# Altium PCB cardio_pcb.PcbDoc
Units mil, origin at the board's own origin, x right, y up, seen from the top; angles counter-clockwise.
Board outline 6890 x 3346 mil, 2 copper layers (Top Layer, Bottom Layer); 111 components, 104 nets, 414 pads, 42 vias.
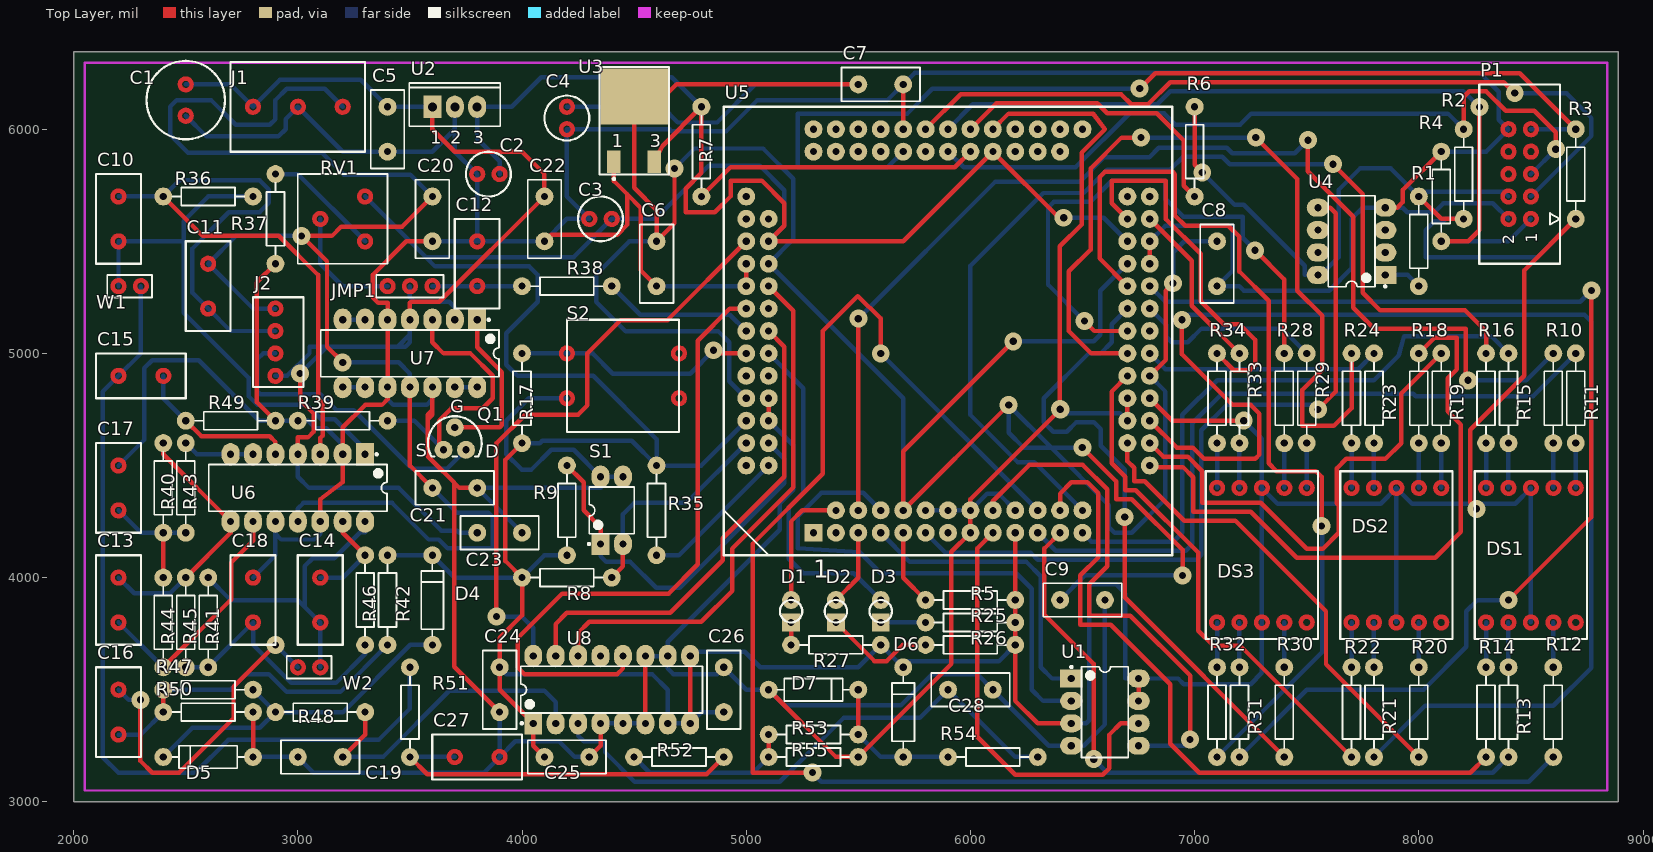
[diagram p0: Top Layer view]
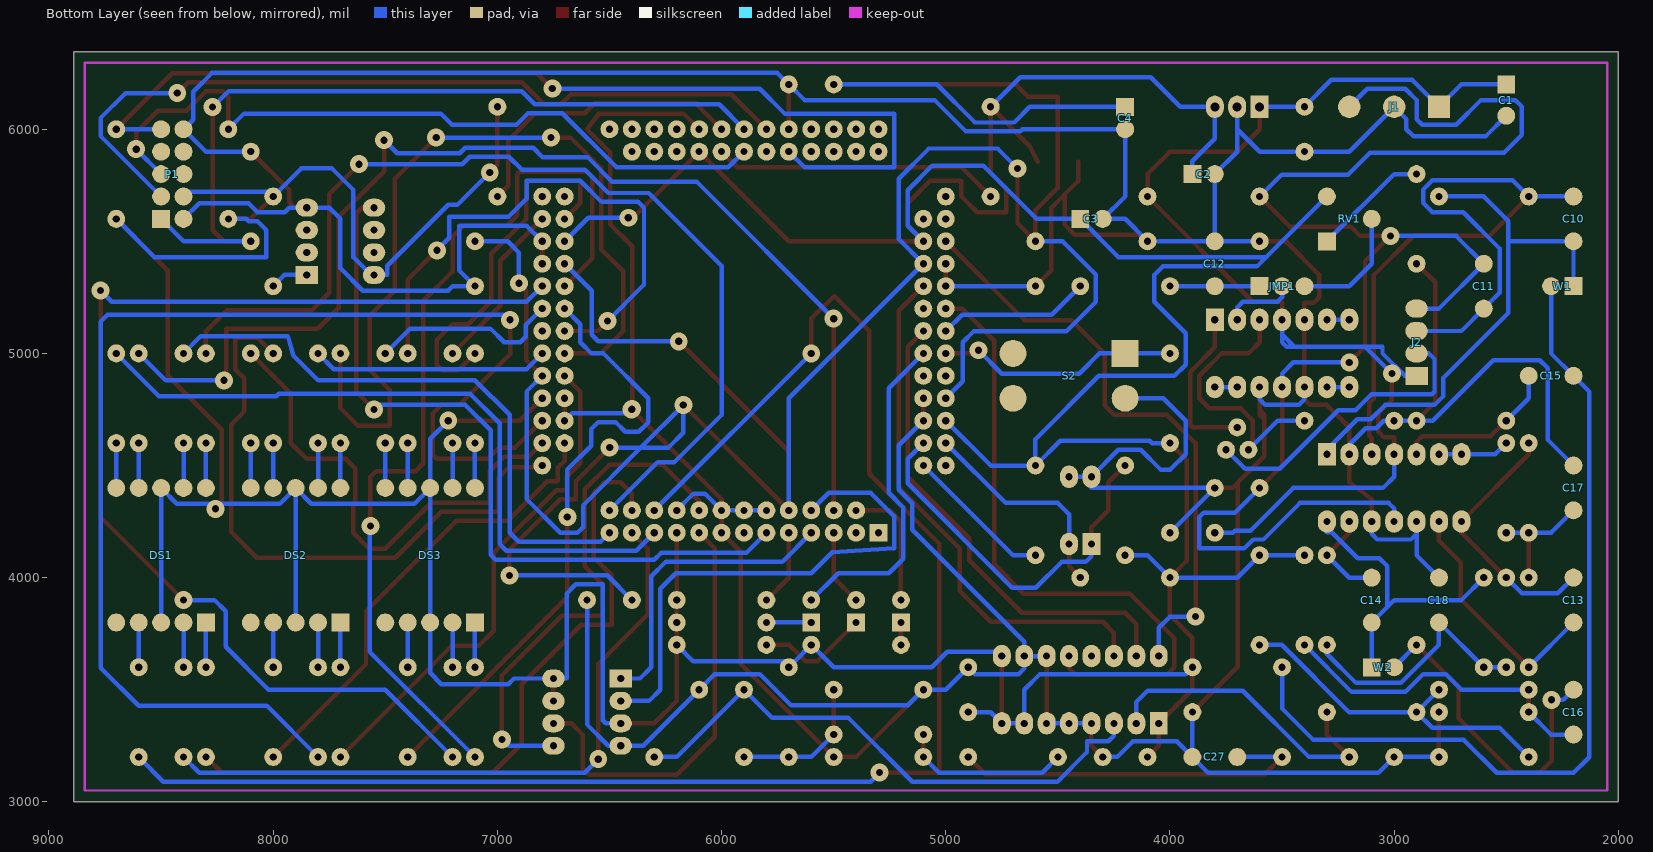
[diagram p1: Bottom Layer view, seen from below]

## Layer stack, top to bottom
Top Solder: solder mask 0.4, Solder Resist, Dk 3.5
Top Layer: signal copper 1.4
Dielectric 1: dielectric 12.6, FR-4, Dk 4.8
Bottom Layer: signal copper 1.4
Bottom Solder: solder mask 0.4, Solder Resist, Dk 3.5

## Board outline
2000,3000 8890,3000 8890,6346 2000,6346

## Design rules (kind name [scope] priority, off if disabled: settings)
Clearance [All] p1: gap=20
PolygonConnect [All] p1: connectstyle=Relief reliefconductorwidth=10 reliefentries=4 polygonreliefangle="90 Angle" airgapwidth=10
RoutingVias [All] p1: holewidth=32 width=80 viastyle="Through Hole" minholewidth=28 minwidth=50 maxholewidth=28 maxwidth=50
SolderMaskExpansion [All] p1: expansion=4
Width [All] p1: maxlimit=20 minlimit=20 preferedwidth=20
30 further rules are at their usual default settings.

## Classes and differential pairs
component class CONTROL: C1 C2 C3 C4 C5 C6 C7 C8 C9 D1 D2 D3 DS1 DS2 DS3 J1 P1 R1 R2 R3 R4 R5 R6 R7 R8 R9 R10 R11 R12 R13 R14 R15 R16 R17 R18 R19 R20 R21 R22 R23 R24 R25 R26 R27 R28 R29 R30 R31 R32 R33 R34 R35 S1 S2 U1 U2 U3 U4 U5
component class INTER: C10 C11 C12 C13 C14 C15 C16 C17 C18 C19 C20 C21 C22 C23 C24 C25 C26 C27 C28 D4 D5 D6 D7 J2 JMP1 Q1 R36 R37 R38 R39 R40 R41 R42 R43 R44 R45 R46 R47 R48 R49 R50 R51 R52 R53 R54 R55 RV1 U6 U7 U8 W1 W2
net class AFFC[0..6]: AFFC0 AFFC1 AFFC2 AFFC3 AFFC4 AFFC5 AFFC6
net class AFFD[0..6]: AFFD0 AFFD1 AFFD2 AFFD3 AFFD4 AFFD5 AFFD6
net class AFFU[0..6]: AFFU0 AFFU1 AFFU2 AFFU3 AFFU4 AFFU5 AFFU6

## Components (designator, comment, footprint, x,y, rotation, side; value= is the part's Value field where it differs from the comment)
C1 "100uF" RB0.14/0.35 2500,6200 r270 top
C2 "2.2uF" RB0.1/0.2 3900,5800 r180 top
C3 "10uF" RB0.1/0.2 4400,5600 r180 top
C4 "10uF" RB0.1/0.2 4200,6100 r270 top
C5 "0.1uF" RAD-0.2 3400,6000 r90 top
C6 "100nF" RAD-0.2 4600,5400 r90 top
C7 "100nF" RAD-0.2 5600,6200 r180 top
C8 "100nF" RAD-0.2 7100,5400 r90 top
C9 "100nF" RAD-0.2 6500,3900 r180 top
C10 "4.7nF" RAD-0.2-BOT 2200,5500 r90 top
C11 "470pF" RAD-0.2-BOT 2600,5200 r90 top
C12 "470nF" RAD-0.2-BOT 3800,5500 r270 top
C13 "15nF" RAD-0.2-BOT 2200,4000 r270 top
C14 "4.7nF" RAD-0.2-BOT 3100,3800 r90 top
C15 "470nF" RAD-0.2-BOT 2400,4900 r180 top
C16 "470nF" RAD-0.2-BOT 2200,3500 r270 top
C17 "220nF" RAD-0.2-BOT 2200,4300 r90 top
C18 "470nF" RAD-0.2-BOT 2800,3800 r90 top
C19 "100nF" RAD-0.2 3100,3200 r0 top
C20 "100nF" RAD-0.2 3600,5600 r90 top
C21 "100nF" RAD-0.2 3700,4400 r180 top
C22 "100nF" RAD-0.2 4100,5600 r90 top
C23 "100nF" RAD-0.2 3900,4200 r180 top
C24 "100nF" RAD-0.2 3900,3500 r90 top
C25 "100nF" RAD-0.2 4200,3200 r180 top
C26 "100nF" RAD-0.2 4900,3500 r270 top
C27 "470nF" RAD-0.2-BOT 3700,3200 r0 top
C28 "100nF" RAD-0.2 6000,3500 r180 top
D1 "LED0" LED-3MM 5200,3800 r90 top
D2 "LED0" LED-3MM 5400,3800 r90 top
D3 "LED0" LED-3MM 5600,3800 r90 top
D4 "1N4148" DIODE-0.4 3600,3900 r90 top
D5 "1N4148" DIODE-0.4 2600,3200 r180 top
D6 "1N4148" DIODE-0.4 5700,3400 r90 top
D7 "1N4148" DIODE-0.4 5300,3500 r0 top
DS1 "Dpy Blue-CA" AFF7SEG-14MM 8300,3800 r0 top
DS2 "Dpy Blue-CA" AFF7SEG-14MM 7700,3800 r0 top
DS3 "Dpy Blue-CA" AFF7SEG-14MM 7100,3800 r0 top
J1 "BORNIER 3 VIS" BORNIER-3 2800,6100 r0 top
J2 "CAPTEUR-CARDIO" KK-1X4M 2900,4900 r90 top
JMP1 "JUMPER-INV" JMP3-INV-0.1 3600,5300 r180 top
P1 "MHDR2X5" HE10-2X5M 8500,5600 r90 top
Q1 "2N7000" NMOS-TO92 3700,4600 r0 top
R1 "1K" AXIAL-0.4 8000,5500 r270 top
R2 "1K" AXIAL-0.4 8200,5800 r90 top
R3 "1K" AXIAL-0.4 8700,5800 r90 top
R4 "1K" AXIAL-0.4 8100,5700 r90 top
R5 "10K" AXIAL-0.4 6000,3900 r180 top
R6 "10K" AXIAL-0.4 7000,5900 r270 top
R7 "10K" AXIAL-0.4 4800,5900 r270 top
R8 "1K" AXIAL-0.4 4200,4000 r180 top
R9 "1K" AXIAL-0.4 4200,4300 r270 top
R10 "120" AXIAL-0.4 8600,4800 r270 top
R11 "120" AXIAL-0.4 8700,4800 r270 top
R12 "120" AXIAL-0.4 8600,3400 r90 top
R13 "120" AXIAL-0.4 8400,3400 r90 top
R14 "120" AXIAL-0.4 8300,3400 r90 top
R15 "120" AXIAL-0.4 8400,4800 r270 top
R16 "120" AXIAL-0.4 8300,4800 r270 top
R17 "1K" AXIAL-0.4 4000,4800 r270 top
R18 "120" AXIAL-0.4 8000,4800 r270 top
R19 "120" AXIAL-0.4 8100,4800 r270 top
R20 "120" AXIAL-0.4 8000,3400 r90 top
R21 "120" AXIAL-0.4 7800,3400 r90 top
R22 "120" AXIAL-0.4 7700,3400 r90 top
R23 "120" AXIAL-0.4 7800,4800 r270 top
R24 "120" AXIAL-0.4 7700,4800 r270 top
R25 "820" AXIAL-0.4 6000,3800 r0 top
R26 "820" AXIAL-0.4 6000,3700 r0 top
R27 "820" AXIAL-0.4 5400,3700 r0 top
R28 "120" AXIAL-0.4 7400,4800 r270 top
R29 "120" AXIAL-0.4 7500,4800 r270 top
R30 "120" AXIAL-0.4 7400,3400 r90 top
R31 "120" AXIAL-0.4 7200,3400 r90 top
R32 "120" AXIAL-0.4 7100,3400 r90 top
R33 "120" AXIAL-0.4 7200,4800 r270 top
R34 "120" AXIAL-0.4 7100,4800 r270 top
R35 "10K" AXIAL-0.4 4600,4300 r90 top
R36 "1M" AXIAL-0.4 2600,5700 r0 top
R37 "100" AXIAL-0.4 2900,5600 r90 top
R38 "3.3K" AXIAL-0.4 4200,5300 r180 top
R39 "82" AXIAL-0.4 3200,4700 r180 top
R40 "390K" AXIAL-0.4 2400,4400 r90 top
R41 "390K" AXIAL-0.4 2600,3800 r90 top
R42 "4.7M" AXIAL-0.4 3400,3900 r90 top
R43 "56K" AXIAL-0.4 2500,4400 r90 top
R44 "200K" AXIAL-0.4 2400,3800 r270 top
R45 "56K" AXIAL-0.4 2500,3800 r90 top
R46 "300K" AXIAL-0.4 3300,3900 r90 top
R47 "2.2M" AXIAL-0.4 2600,3500 r180 top
R48 "1K" AXIAL-0.4 3100,3400 r180 top
R49 "4.7M" AXIAL-0.4 2700,4700 r180 top
R50 "4.7M" AXIAL-0.4 2600,3400 r180 top
R51 "6.8M" AXIAL-0.4 3500,3400 r90 top
R52 "200" AXIAL-0.4 4700,3200 r180 top
R53 "2.2K" AXIAL-0.4 5300,3300 r180 top
R54 "1K" AXIAL-0.4 6100,3200 r180 top
R55 "100" AXIAL-0.4 5300,3200 r0 top
RV1 "1K" VR-3386F-T 3200,5600 r90 top
S1 "SW2 DIP4" DIP-4 4400,4300 r90 top
S2 "SW-PB" BP-MJTP12 4200,5000 r270 top
U1 "EPCS1SI8N" DIP-8 6600,3400 r0 top
U2 "LF33CV" REG-TO220 3600,6100 r90 top
U3 "NCP1117DT" REG-DPAK 4500,6000 r0 top
U4 "SG-8002DCPCB 20 MHZ" DIP-8 7700,5500 r180 top
U5 "EP1C3T100" SUPPORT-TQFP100 5300,4200 r90 top
U6 "TL074CN" DIP-14 3000,4400 r270 top
U7 "TL074CN" DIP-14 3500,5000 r270 top
U8 "ADS7841PB" DIP-16 4400,3500 r90 top
W1 "Jumper" JMP2-0.1 2200,5300 r0 top
W2 "Jumper" JMP2-0.1 3100,3600 r180 top

## Footprints (in the part's own frame and the unit in brackets; to place one, negate y for a bottom-side part, rotate by r counter-clockwise, add the part's x,y. Pads: shape width x height; smd on the part's side, far side on the other; paste and mask are expansions set on the pad)
AFF7SEG-14MM [mil] "Aff 7 seg (14mm) footprint"
  rect 80x80 smd far side: 1(0,0)
  round 80 smd far side: 2(100,0) 3(200,0) 4(300,0) 5(400,0) 6(400,600) 7(300,600) 8(200,600) 9(100,600) 10(0,600)
  Top Layer circle w20: c0,600 r26
  Top Layer circle w20: c100,600 r26
  Top Layer circle w20: c200,600 r26
  Top Layer circle w20: c300,600 r26
  Top Layer circle w20: c400,600 r26
  Top Layer circle w20: c400,0 r26
  Top Layer circle w20: c300,0 r26
  Top Layer circle w20: c200,0 r26
  Top Layer circle w20: c100,0 r26
  Top Layer circle w20: c0,0 r26
  silkscreen extent -50,-74 450,674
AXIAL-0.4 [mil] "Axial Device, Thru-Hole; 2 Leads; 0.4 in Pin Spacing"
  round 80 hole 32: 1(-200,0) 2(200,0)
  silkscreen extent -160,-40 160,40
BORNIER-3 [mil] "BORNIER-3 footprint"
  rect 100x100 smd far side: 1(0,0)
  round 100 smd far side: 2(200,0) 3(400,0)
  Top Layer circle w20: c0,0 r26
  Top Layer circle w20: c200,0 r26
  Top Layer circle w20: c400,0 r26
  silkscreen extent -100,-200 500,200
BP-MJTP12 [mil] "BP footprint"
  rect 120x120 smd far side: 1(0,0)
  round 120 smd far side: 2(200,0) 3(200,500) 4(0,500)
  Top Layer circle w20: c0,500 r26
  Top Layer circle w20: c200,500 r26
  Top Layer circle w20: c200,0 r26
  Top Layer circle w20: c0,0 r26
  silkscreen extent -150,0 350,500
DIODE-0.4 [mil] "Diode, Thru-Hole; 2 Leads; 0.4 in Pin Spacing"
  round 80 hole 32: 1(-200,0) 2(200,0)
  silkscreen extent -160,-50 160,50
DIP-4 [mil] "DIP; 4 Leads; Row Spacing 7.62 mm; Pitch 2.54 mm"
  rect 100x80 hole 32: 1(-150,50)
  oval 100x80 hole 32: 2(-150,-50) 3(150,-50) 4(150,50)
  silkscreen extent -155,-100 104,106, body extent -124,-98 124,98, height 220
DIP-8 [mil] "DIP; 8 Leads; Row Spacing 7.62 mm; Pitch 2.54 mm"
  rect 100x80 hole 32: 1(-150,150)
  oval 100x80 hole 32: 2(-150,50) 3(-150,-50) 4(-150,-150) 5(150,-150) 6(150,-50) 7(150,50) 8(150,150)
  silkscreen extent -155,-203 104,206, body extent -142,-203 142,203, height 200
DIP-14 [mil] "DIP; 14 Leads; Row Spacing 7.62 mm; Pitch 2.54 mm"
  rect 100x80 hole 32: 1(-150,300)
  oval 100x80 hole 32: 2(-150,200) 3(-150,100) 4(-150,0) 5(-150,-100) 6(-150,-200) 7(-150,-300) 8(150,-300) 9(150,-200) 10(150,-100) 11(150,0) 12(150,100) 13(150,200) 14(150,300)
  silkscreen extent -155,-398 104,398, body extent -142,-398 142,398, height 200
DIP-16 [mil] "DIP; 16 Leads; Row Spacing 7.62 mm; Pitch 2.54 mm"
  rect 100x80 hole 32: 1(-150,350)
  oval 100x80 hole 32: 2(-150,250) 3(-150,150) 4(-150,50) 5(-150,-50) 6(-150,-150) 7(-150,-250) 8(-150,-350) 9(150,-350) 10(150,-250) 11(150,-150) 12(150,-50) 13(150,50) 14(150,150) 15(150,250) 16(150,350)
  silkscreen extent -155,-406 104,406, body extent -142,-405 142,405, height 200
HE10-2X5M [mil] "CONNECTOR HE10 2X5 MALE"
  rect 80x80 smd far side: 1(0,0)
  round 80 smd far side: 2(0,100) 3(100,0) 4(100,100) 5(200,0) 6(200,100) 7(300,0) 8(300,100) 9(400,0) 10(400,100)
  Top Layer circle w20: c0,0 r26
  Top Layer circle w20: c100,0 r26
  Top Layer circle w20: c200,0 r26
  Top Layer circle w20: c300,0 r26
  Top Layer circle w20: c400,0 r26
  Top Layer circle w20: c400,100 r26
  Top Layer circle w20: c300,100 r26
  Top Layer circle w20: c200,100 r26
  Top Layer circle w20: c100,100 r26
  Top Layer circle w20: c0,100 r26
  silkscreen extent -200,-130 600,230
JMP2-0.1 [mil] "CAVALIER 3cts HE14 PAS 2.54MM"
  rect 80x80 smd far side: 1(0,0)
  round 80 smd far side: 2(100,0)
  Top Layer circle w20: c0,0 r26
  Top Layer circle w20: c100,0 r26
  silkscreen extent -50,-50 150,50
JMP3-INV-0.1 [mil] "CAVALIER 3cts HE14 PAS 2.54MM"
  rect 80x80 smd far side: 1(0,0)
  round 80 smd far side: 2(100,0) 3(200,0)
  Top Layer circle w20: c0,0 r26
  Top Layer circle w20: c100,0 r26
  Top Layer circle w20: c200,0 r26
  silkscreen extent -50,-50 250,50
KK-1X4M [mil]
  rect 80x100 smd far side: 1(0,0)
  oval 80x100 smd far side: 2(100,0) 3(200,0) 4(300,0)
  Top Layer circle w20: c0,0 r26
  Top Layer circle w20: c100,0 r26
  Top Layer circle w20: c200,0 r26
  Top Layer circle w20: c300,0 r26
  silkscreen extent -50,-125 350,100
LED-3MM [mil] "Led footprint"
  rect 80x80 hole 32: 1(0,0)
  round 80 hole 32: 2(100,0)
  silkscreen extent 0,-50 100,50
NMOS-TO92 [mil] "NMOS TO92"
  round 80 hole 32: 1(50,-30) 2(0,70) 3(-50,-30)
  silkscreen extent -120,-60 120,120
RAD-0.2 [mil] "Radial Cap, Thru-Hole; 2 Leads; 0.2 in Pin Spacing"
  round 80 hole 32: 1(-100,0) 2(100,0)
  silkscreen extent -175,-75 175,75
RAD-0.2-BOT [mil]
  round 80 smd far side: 1(0,0) 2(200,0)
  Top Layer circle w20: c0,0 r26
  Top Layer circle w20: c200,0 r26
  silkscreen extent -100,-100 300,100
RB0.1/0.2 [mil] "Capa < 100uF Footprint"
  rect 80x80 smd far side: 1(0,0)
  round 80 smd far side: 2(100,0)
  Top Layer circle w20: c100,0 r26
  Top Layer circle w20: c0,0 r26
  silkscreen extent -50,-100 150,100
RB0.14/0.35 [mil] "Capa <470 uF footprint"
  rect 80x80 smd far side: 1(0,0)
  round 80 smd far side: 2(140,0)
  Top Layer circle w20: c0,0 r26
  Top Layer circle w20: c140,0 r26
  silkscreen extent -105,-175 245,175
REG-DPAK [mm]
  rect 1.524x2.54 smd: 1(-2.285,-3.7) 3(2.285,-3.7)
  rect 7.62x6.35 smd: 4(0,3.7)
  silkscreen extent -3.94,-5.75 3.94,7.06
REG-TO220 [mil]
  rect 100x80 hole 40: 1(0,0)
  oval 100x80 hole 40: 2(0,-100) 3(0,-200)
  silkscreen extent -87,-303 106,103
SUPPORT-TQFP100 [mil]
  rect 80x80 hole 32: 1(0,0)
  round 80 hole 32: 2(0,-100) 3(100,-100) 4(0,-200) 5(100,-200) 6(0,-300) 7(100,-300) 8(0,-400) 9(100,-400) 10(0,-500) 11(100,-500) 12(0,-600) 13(100,-600) 14(0,-700) 15(100,-700) 16(0,-800) 17(100,-800) 18(0,-900) 19(100,-900) 20(0,-1000) 21(100,-1000) 22(0,-1100) 23(100,-1100) 24(0,-1200) 25(100,-1200) 26(300,-1500) 27(400,-1500) 28(400,-1400) 29(500,-1500) 30(500,-1400) 31(600,-1500) 32(600,-1400) 33(700,-1500) 34(700,-1400) 35(800,-1500) 36(800,-1400) 37(900,-1500) 38(900,-1400) 39(1000,-1500) 40(1000,-1400) 41(1100,-1500) 42(1100,-1400) 43(1200,-1500) 44(1200,-1400) 45(1300,-1500) 46(1300,-1400) 47(1400,-1500) 48(1400,-1400) 49(1500,-1500) 50(1500,-1400) 51(1800,-1200) 52(1800,-1100) 53(1700,-1100) 54(1800,-1000) 55(1700,-1000) 56(1800,-900) 57(1700,-900) 58(1800,-800) 59(1700,-800) 60(1800,-700) 61(1700,-700) 62(1800,-600) 63(1700,-600) 64(1800,-500) 65(1700,-500) 66(1800,-400) 67(1700,-400) 68(1800,-300) 69(1700,-300) 70(1800,-200) 71(1700,-200) 72(1800,-100) 73(1700,-100) 74(1800,0) 75(1700,0) 76(1500,300) 77(1400,300) 78(1400,200) 79(1300,300) 80(1300,200) 81(1200,300) 82(1200,200) 83(1100,300) 84(1100,200) 85(1000,300) 86(1000,200) 87(900,300) 88(900,200) 89(800,300) 90(800,200) 91(700,300) 92(700,200) 93(600,300) 94(600,200) 95(500,300) 96(500,200) 97(400,300) 98(400,200) 99(300,300) 100(300,200)
  silkscreen extent -100,-1600 1900,400
VR-3386F-T [mil] "TRIMMER serie 3386F-T"
  rect 80x80 smd far side: 1(-100,-100)
  round 80 smd far side: 2(100,-100) 3(0,100)
  Top Layer circle w20: c100,-100 r26
  Top Layer circle w20: c-100,-100 r26
  Top Layer circle w20: c0,100 r26
  silkscreen extent -200,-200 200,200

## Part data
C1 C2 C3 C4: library part "Cap Pol2", "Electrolytic Polarized Capacitor (Axial)"
C5 C6 C7 C8 C9: library part Cap, "Ceramic Multilayer Capacitor"
C10 C11 C12 C13 C14 C15 C16 C17 C18 C27: library part Cap, "Capacitor Polyester 5%"
C19 C20 C21 C22 C23 C24 C25 C26 C28: library part Cap, "Capacitor Céramique Multicouche X7R 50V RadialPas=5.08mm 50%"
D1 D2 D3: "Typical INFRARED GaAs LED"
D4 D5 D6 D7: "High Conductance Fast Diode"
DS1 DS2 DS3: "14.2 mm General Purpose Blue 7-Segment Display: CA, RH DP, Gray Surface"
J1: library part BORNIER-3, "Bornier 3 cts"
J2: "CAPTEUR CARDIO"
JMP1: "JUMPER INVERSEUR HE14 MALE 3 cts"
P1: "Header, 5-Pin, Dual row"
Q1: "N-channel Enhancement Mode Field-effect Transistor"
R1 R2 R3 R4 R5 R6 R7 R8 R9 R10 R11 R12 R13 R14 R15 R16 R17 R18 R19 R20 R21 R22 R23 R24 R25 R26 R27 R28 R29 R30 R31 R32 R33 R34 R35: library part Res2, "Resistor"
R36 R40 R41 R42 R43 R44 R45 R46 R47 R49 R50 R51: library part Res2, "Resistor 1% Couche métallique 0.4W Axial L=7mm"
R37 R38 R39 R48 R52 R53 R54 R55: library part Res2, "Resistor 5% Couche métallique 0.4W Axial L=7mm"
RV1: library part R-TRIM, "TRIMMER PRECISION POTENTIOMETER"
S1: library part SW2-DIP4, "Dual Switch in DIP 4 pin"
S2: "Switch"
U1: "EPCS1 Series, In-system programmable 3.3V serial configuration device, 8-Pin SOIC, 1-Megabit, Industrial Grade, Pb-Free"
U2: "500mA, Very Low Drop (0.45V) Voltage Regulator"
U3: "Low drop out Positive Fix. or Adj. Voltage Regulator"
U4: "OSCILLATOR SG-8002DCPCB 20 MHZ 5V"
U5: "FPGA CYCLONE 1 TQPF100"
U6 U7: "Low-Noise JFET-Input Operational Amplifier"
U8: "Analog to Digital converter"
W1 W2: "Jumper Wire"

## Via types
v1: diameter 80, hole 32, Top Layer to Bottom Layer, 42 vias

## Nets (pads, with @x,y where several pads share a name; then routed paths per layer and width w, separated by ;. In a path a pad name is that pad's centre, name@x,y a point inside that pad or via, vN(x,y) a via of type N, cw(c..) or ccw(c..) an arc to the next point about the centre after c; other vN are vias at no path point)
1V5: C4.1 C6.2 C7.2 C8.2 C9.2 U3.4 U5.9 U5.33 U5.44 U5.82 U5.93 | length 13966.2
  Top Layer w20: v1(4680,5825) 4680,5580 C6.2 4600,5639 4500,5739 U3.4 4635,6145.67 4689.33,6200 C7.2 ; v1(6171,4770) v1(6170,4770) U5.9 5700,4563 v1(6191,5054) ; v1(6499.03,4580) 6650.24,4428.79 6650.24,4350 6720,4350 6946,4124 v1(6946,4010) ; U5.33 6871,4971 6871,5280 v1(6904,5313)
  Bottom Layer w20: C4.1 4625,6100 4695,6030 4870,6030 5040,6200 C7.2 ; C6.2 4479,5500 4330,5351 4330,5230 4462,5098 4876,5098 4924,5050 4924,4876 U5.93 ; v1(4680,5825) 4769,5914 5075,5914 5210,5779 5210,5510 U5.82 5700,4800 U5.9 ; v1(6170,4770) v1@6171,4769 ; v1(6171,4770) v1@6171,4769 ; v1(6191,5054) 6550,5054 6579,5083 6579,5279 U5.44 ; C9.2 6510,4010 v1(6946,4010) ; v1(6499.03,4580) 6360,4580 ; U5.33 6870,4830 6870,4351 6719,4200 6643,4200 6618,4225 6618,4322 6360,4580 ; v1(6904,5313) 6904,5450 6954,5500 C8.2 ; v1@6171,4769 6171,4645.96 6236.96,4580 6360,4580 ; v1@6171,4769 6360,4580
3V3: C2.1 C3.1 C24.2 C25.2 C26.2 D4.2 D6.2 DS1.3 DS1.8 DS2.3 DS2.8 DS3.3 DS3.8 P1.4 R1.1 R2.1 R3.1 R5.1 R6.1 R7.1 R8.2 R9.2 R17.2 R25.2 R26.2 R27.2 R35.2 R42.2 RV1.2 U1.3 U1.7 U1.8 U2.3 U3.3 U4.8 U5.18 U5.31 U5.46 U5.59 U5.80 U5.95 U8.1 U8.7 U8.8 U8.9 | length 28425.8
  Top Layer w20: R17.2 3926,4526 3926,4074 R8.2 4000,3832 3900,3732 C24.2 3900,3500 U8.1 4050,3250 C25.2 ; U3.3 4626.96,5926.96 R7.1 4800,5804.98 4730,5734.98 4730,5630 4860,5630 4930,5700 4930,5770 5070,5770 5170,5670 5170,5570 U5.80 5700,5500 U5.59 6395,5605 v1(6416,5605) ; U8.8 U8.9 ; U5.18 R5.1 R25.2 R26.2 6200,3450 6300,3350 U1.3 ; U1.7 U1.8 ; U5.31 6900,4700 v1(7219,4700) ; R6.1 7000,5841 v1(7034,5807) ; R1.1 8100,5600 R2.1 ; v1(8258,4307) 8230,4335 8230,4660 8470,4900 8470,5370 R3.1
  Bottom Layer w20: RV1.2 3570,5430 ; R42.2 D4.2 3700,4000 R8.2 4100,4100 R9.2 ; C24.2 3930,3570 4580,3570 4650,3500 U8.7 U8.8 4800,3400 C26.2 ; C2.1 3900,5857 3800,5957 U2.3 3954,6100 4086,6232 4668,6232 R7.1 ; R17.2 4080,4600 4090,4610 4490,4610 R35.2 ; U8.9 4750,3670 4993,3670 5063,3600 5500,3600 R27.2 D6.2@5674,3626 ; U5.95 4800,4500 R35.2 ; U5.80 5170,5570 5170,5728 5061,5837 4832,5837 4595,5600 C3.1 4230,5430 3570,5430 ; D6.2 D6.2@5674,3626 ; R26.2 6126,3626 D6.2@5674,3626 ; v1(6416,5605) 6595,5605 U5.46 ; U1.3 6516,3350 6530,3364 6530,3970 6650,3970 6691,3929 6691,3550 U1.8 6926,3550 6951,3525 7250,3525 7300,3575 DS3.3 DS3.8 ; v1(7034,5807) 7177.93,5663.07 7219.58,5663.07 7491,5391.64 7491,5350 U4.8 7563,5350 7642,5429 7642,5729 7738,5825 7875,5825 R1.1 8022,5722 8378,5722 P1.4 ; v1(7219,4700) 7300,4619 DS3.8 ; DS2.3 DS2.8 ; R2.1 8120,5600 8110,5590 8070,5590 8030,5550 8030,5430 8530,5430 R3.1 ; v1(8258,4307) v1@8235,4330 ; DS1.3 DS1.8 8430,4330 v1@8235,4330 ; 3570,5430 3612,5388 4032,5388 4070,5350 4070,5230 3930,5090 3930,4950 3980,4900 4317,4900 4600,4617 R35.2 ; DS3.8 7370,4330 7830,4330 DS2.8 ; DS2.8 7970,4330 v1@8235,4330
+12V: C1.1 C5.2 C22.2 C23.2 J1.1 J2.1 U2.1 U6.4 U7.4 | length 5366.4
  Top Layer w20: U6.4 3000,4625 3045,4625 3070,4650 3070,4732 3010,4792 v1(3010,4910) ; U7.4 3500,5225 3506,5231 3631,5231 C22.2 4100,5800 4000,5900 3700,5900 3600,6000 U2.1
  Bottom Layer w20: C1.1 2700,6200 J1.1 2920,6220 3280,6220 C5.2 U2.1 ; J2.1 2952,4900 3052,5000 3052,5030 3130,5030 ; U6.4 3000,4450 3050,4400 3450,4400 3640,4210 3710,4210 3720,4200 C23.2 ; v1(3010,4910) 3130,5030 ; U7.4 3500,5085 ; 3130,5030 3445,5030 ; 3445,5030 3480,5030 3500,5050 3500,5085 ; 3445,5030 3500,5085
-12V: C11.2 C20.2 C21.2 J1.3 J2.4 U6.11 U7.11 | length 6891.4
  Top Layer w20: v1(3200,4960) 3130,5030 3130,5411 v1(3017,5524) 3152,5524 3194,5566 3466,5566 C20.2 ; U7.11 3500,4500 C21.2
  Bottom Layer w20: J2.4 2800,5200 C11.2 2724,5524 v1(3017,5524) ; U6.11 3000,4308 3025,4333 3420,4333 3583,4170 3629,4170 3669,4130 3870,4130 3870,4270 3850,4290 3710,4290 C21.2 ; v1(3200,4960) 3450,4960 3500,4910 U7.11 ; J1.3 3120,6180 2950,6180 2900,6130 2900,6045 2875,6020 2723,6020 2613,6130 2460,6130 2430,6100 2430,5975 2510,5895 3108,5895 3205,5798 3502,5798 C20.2
AFFC0: R28.1 U5.38 | length 2500.6
  Top Layer w20: v1(6509,5144) 6553,5100 U5.38 ; v1(7270,5460) 7400,5330 R28.1
  Bottom Layer w20: v1(6509,5144) 6346,5307 6346,5650 6371.51,5675.51 6535.51,5675.51 6630,5770 6870,5770 6870,5690 6950,5610 7214,5610 7214,5516 v1(7270,5460)
AFFC1: R29.1 U5.39 | length 863.8
  Bottom Layer w20: U5.39 6873,5127 6873,5075 6898,5050 6970,5050 7031,5111 7389,5111 R29.1
AFFC2: R30.1 U5.40 | length 2798.3
  Top Layer w20: v1(6688,4270) 6688,3912 R30.1
  Bottom Layer w20: v1(6688,4270) 6688,4482 6581.27,4588.73 6581.27,4662.73 6550,4694 6473,4694 6429,4650 6369,4650 6327,4692 6327,4800 6527,5000 6580,5000 6630,5050 6630,5130 U5.40
AFFC3: R31.1 U5.41 | length 5136.1
  Top Layer w20: v1(8400,3900) 8770,4270 v1(8770,5280)
  Bottom Layer w20: U5.41 6870,5230 8720,5230 v1(8770,5280) ; R31.1 7500,3500 8021,3500 8212,3691 8212,3850 8262,3900 v1(8400,3900)
AFFC4: R32.1 U5.42 | length 4170.5
  Top Layer w20: U5.42 6576,5424 6576,5786 6600,5810 6902,5810 6912,5800 6912,5615.57 6957.57,5570 7150,5570 7200,5520 7200,5365 7330,5235 7330,4510 7365,4475 7541,4475 7566,4450 v1(7566,4230)
  Bottom Layer w20: R32.1 7570,3670 7570,4226 v1(7566,4230)
AFFC5: R33.1 U5.47 | length 765.7
  Top Layer w20: U5.47 6987.1,5412.9 6987.1,5212.9 R33.1
AFFC6: R34.1 U5.48 | length 1678.3
  Top Layer w20: U5.48 6630,5670 6630,5770 6872,5770 6872,5599 7027.1,5443.9 7027.1,5232.9 7130,5130 7200,5130 7270,5060 7270,4950 7245,4925 7175,4925 R34.1
AFFD0: R18.1 U5.26 | length 2806
  Top Layer w20: U5.26 6800,4493 6948,4493 6994,4447 6994,4294 7250,4294 7455,4089 8073,4089 8188,4204 8188,4682 8129,4741 8129,4889 8170,4930 8170,5070 8070,5070 R18.1
AFFD1: R19.1 U5.27 | length 2248.9
  Top Layer w20: U5.27 6860,4540 6969,4540 7034,4475 7034,4334 7295.14,4334 7500,4129.14 7572.29,4129.14 7643.14,4200 7643.14,4322.86 7634,4332 7634,4487 7677,4530 7851,4530 7921,4600 7921,4821 R19.1
AFFD2: R20.1 U5.28 | length 2100
  Top Layer w20: U5.28 6700,4520 6730.24,4489.76 6730.24,4430 6778,4430 6954,4254 7182,4254 7586,3850 7586,3614 R20.1
AFFD3: R21.1 U5.29 | length 5885.3
  Top Layer w20: U5.29 6920,4580 6992,4580 7042,4530 7270,4530 7289,4549 7289,4731 7250,4770 7170,4770 6943,4997 v1(6943,5150)
  Bottom Layer w20: v1(6943,5150) 6965,5172 8739,5172 8770,5141 8770,3598 8600,3428 8028,3428 R21.1
AFFD4: R22.1 U5.34 | length 2271.1
  Top Layer w20: U5.34 6630,4830 6630,4510.24 6690.24,4450 6690.24,4390 6738,4390 7016,4112 7016,3763 7084,3695 7205,3695 R22.1
AFFD5: R23.1 U5.35 | length 1058
  Bottom Layer w20: U5.35 6870,4930 7730,4930 R23.1
AFFD6: R24.1 U5.36 | length 3804.8
  Top Layer w20: U5.36 6539,5000 6439,5100 6439,5366.43 6536,5463.43 6536,5825 6674,5963 v1(6761,5963) ; v1(7273,5963) 7458,5778 7458,5280 7570,5168 7570,4927 7480,4837 7480,4677.16 7621.59,4677.16 7700,4755.57 R24.1
  Bottom Layer w20: v1(6761,5963) v1(7273,5963)
AFFU0: R10.1 U5.5 | length 5246.1
  Top Layer w20: U5.5 v1(5500,5155) ; v1(7505,5951) 7505,5812 7707.53,5609.47 7707.53,5203.47 7801,5110 8210,5110 8210,4890 v1(8220,4880)
  Bottom Layer w20: v1(5500,5155) 6110,5765 6487,5765 6596.18,5874.18 6797.21,5874.18 6840.02,5917 7144,5917 7168,5893 7447,5893 v1(7505,5951) ; v1(8220,4880) 8480,4880 R10.1
AFFU1: R11.1 U5.20 | length 3121.5
  Bottom Layer w20: U5.20 6380,4120 6960,4120 6990,4150 6990,4688 7122,4820 7975.71,4820 7986.19,4809.52 8509.52,4809.52 R11.1
AFFU2: R12.1 U5.21 | length 7241.1
  Top Layer w20: v1(5295,3130) 5030,3130 5030,4152 5341,4463 5341,5100 5497,5256 5600,5156 v1(5600,5000)
  Bottom Layer w20: v1(5295,3130) 5335,3090 8490,3090 R12.1 ; v1(5600,5000) U5.21
AFFU3: R13.1 U5.22 | length 3034
  Top Layer w20: U5.22 6330,4130 6330,3835 6550,3615 v1(6550,3190)
  Bottom Layer w20: v1(6550,3190) 6610,3130 8330,3130 R13.1
AFFU4: R14.1 U5.23 | length 3173.3
  Top Layer w20: U5.23 6400,4375 6450,4425 6522,4425 6570,4377 6570,4090 6490,4010 6490,3790 6626,3790 6892,3524 6892,3259 7021,3130 8230,3130 R14.1
AFFU5: R15.1 U5.24 | length 2664.6
  Bottom Layer w20: U5.24 6540,4160 6905.11,4160 6945.11,4200 6945.11,4725.86 7100.25,4881 7800,4881 7910,4991 7934,5076 8324,5076 R15.1
AFFU6: R16.1 U5.25 | length 4522.2
  Top Layer w20: v1(7617,5844) 7750,5711 7750,5270 7827,5193 8206,5193 8300,5099 R16.1
  Bottom Layer w20: U5.25 6284.57,4515.43 6210.28,4515.43 6000,4725.72 6000,5390.51 6325,5715.51 6505.51,5715.51 6610,5820 6892,5820 6949,5877 7123,5877 7156,5844 v1(7617,5844)
BP-REG: R17.1 S2.1 U5.89 | length 1086.2
  Top Layer w20: v1(4854,5014) 4868,5000 U5.89
  Bottom Layer w20: R17.1 S2.1 4315,5000 4405,4910 4750,4910 v1(4854,5014)
CH0: C19.2 R48.1 U8.2 | length 1429.3
  Top Layer w20: C19.2 3300,3300 R48.1
  Bottom Layer w20: C19.2 3380,3200 3675,3495 4100,3495 4150,3445 U8.2
CH1: C28.2 R54.1 U8.3 | length 2512.1
  Bottom Layer w20: U8.3 4250,3295 4275,3270 4370,3270 4370,3222 4502,3090 5150,3090 5434,3374 5774,3374 C28.2 6200,3200 R54.1
GND: C1.2 C2.2 C3.2 C4.2 C5.1 C6.1 C7.1 C8.1 C9.1 C12.1 C17.2 C18.2 C19.1 C20.1 C21.1 C22.1 C23.1 C24.1 C25.1 C26.1 C27.2 C28.1 D5.1 D7.1 J1.2 P1.2 P1.10 R4.2 R37.1 R39.2 R49.1 R50.1 R55.2 S1.3 S1.4 S2.2 U1.4 U2.2 U3.1 U4.4 U5.11 U5.13 U5.14 U5.15 U5.19 U5.30 U5.32 U5.43 U5.45 U5.58 U5.66 U5.81 U5.83 U5.94 U5.96 U6.2 U6.10 U6.12 U7.5 U7.10 U7.12 U8.4 U8.5 U8.6 U8.10 U8.11 | length 33918.8
  Top Layer w20: D5.1 R50.1 ; R49.1 2817,4783 2817,5317 R37.1 ; U6.12 3100,4350 3200,4425 U6.2 3200,4670 3300,4770 3375,4770 3400,4795 U7.10 U7.5 3400,5225 3359,5225 3334,5250 3334,5350 3484,5500 C20.1 ; U7.12 3600,4747 ; C21.1 3721,4400 3580,4541 ; C24.1 3697,3603 3697,4424 3580,4541 ; C22.1 4130,5530 4425,5530 4470,5575 4470,5709 ; C25.1 4350,3250 U8.4 ; U3.1 4410.04,5768.96 4470,5709 ; U8.6 U8.11 ; C6.1 4530,5370 4530,5649 4470,5709 ; U5.83 U5.81 ; D7.1 5400,3200 R55.2 5915,3615 5915,4115 U5.14 U5.15 6000,4349 v1(6401,4750) ; U5.96 U5.94 ; U5.66 C7.1 ; U5.58 6170,6070 6547,6070 6600,6000 6496,5896 6496,5575 6399,5478 v1(6399,4752) ; U5.30 U5.32 ; U5.43 U5.45 ; U4.4 7904,5650 7929,5675 7929,5729 R4.2 ; 3580,4541 3580,4707 ; 3580,4707 3580,4727 3600,4747 ; 3580,4707 3600,4727 3600,4747
  Bottom Layer w20: C17.2 2314,4614 2314,4934 2350,4970 2558.28,4970 2828.28,4700 R49.1 R39.2 3045.83,4700 3079.87,4665.96 3126.97,4665.96 3200,4592.93 U6.2 ; C1.2 2592.41,5967.59 2913.03,5967.59 2945.44,6000 2945.44,6045.44 J1.2 3200,5900 C5.1 3600,5900 3700,6000 ; D5.1 C19.1 3070,3130 3830,3130 C27.2 ; C18.2 2900,4100 2900,4195 ; U6.10 2900,4195 ; U6.12 3100,4195 3075,4170 2925,4170 2900,4195 ; U7.10 3400,4795 3425,4770 3575,4770 3600,4795 U7.12 ; C20.1 C12.1 ; U2.2 3700,6000 ; C24.1 C27.2 ; C23.1 C21.1 4350,4400 S1.4 ; S2.2 4030,4800 3930,4700 3930,4550 3998,4482 4042,4482 4130,4570 4230,4570 S1.4 ; C25.1 4235,3200 4165,3270 3970,3270 C27.2 ; U8.4 U8.5 U8.6 ; S1.3 S1.4 ; U8.11 U8.10 ; C6.1 U5.83 ; U5.96 5210,4590 5210,4392 5150,4332 5150,4214 4650,3714 U8.10 ; U5.11 U5.13 U5.15 6075,4375 6125,4375 U5.19 ; v1(6399,4752) v1(6401,4750) 6417,4734 6666,4734 U5.30 ; C9.1 6600,3345 6505,3250 U1.4 6350,3250 C28.1 6030,3570 5830,3570 5690,3430 5170,3430 D7.1 5000,3500 C26.1 4870,3570 4675,3570 4650,3595 U8.10 ; U5.45 6870,5570 7170,5570 7170,5370 C8.1 7200,5300 7220,5280 7600,5280 7700,5380 7700,5600 7750,5650 U4.4 7929,5650 7949,5630 8070,5630 8110,5670 8330,5670 P1.2 ; R4.2 8300,5900 P1.10 8357.2,6042.8 8357.2,6166.8 8273,6251 5751,6251 C7.1 5630,6130 5050,6130 4910,5990 4668,5990 4658,6000 C4.2 4200,5700 C3.2 4200,5600 C22.1 C12.1 ; 3700,6000 3700,5900 C2.2 C12.1
LED-AL: D3.2 U5.90 | length 1493.3
  Bottom Layer w20: U5.90 5255,4845 5255,4378 5190,4313 5190,4084 5254,4020 5480,4020 D3.2
LED-BF: D1.2 U5.3 | length 570.7
  Top Layer w20: D1.2 5200,4250 5250,4300 U5.3
LED-POU: D2.2 U5.4 | length 341.4
  Top Layer w20: D2.2 5500,4000 U5.4
NetC10_1: C10.1 R36.2 U6.1 W1.1 | length 2385.1
  Bottom Layer w20: W1.1 C10.1 2490,5500 ; R36.2 2600,5700 2490,5590 2490,5500 ; U6.1 3300,4570 3164.04,4705.96 3104.04,4705.96 3040,4770 2820,4770 2780,4810 2780,4891 2490,5181 2490,5500
NetC10_2: C10.2 C11.1 J2.3 R36.1 U6.3 | length 3486.7
  Top Layer w20: R36.1 2575,5525 2915,5525 3090,5350 3090,4798.53 3110,4778.53 3110,4633 3100,4623 U6.3
  Bottom Layer w20: C10.2 R36.1 2472,5772 2829,5772 2870,5731 2870,5671 2829,5630 2692,5630 2530,5468 2530,5270 C11.1 2700,5100 J2.3
NetC12_2: C12.2 JMP1.1 R38.2 | length 400
  Bottom Layer w20: JMP1.1 C12.2 R38.2
NetC13_1: C13.1 R40.2 R45.2 U6.8 | length 1165.1
  Top Layer w20: R40.2 2400,4550 U6.8 2700,4200 R45.2
  Bottom Layer w20: C13.1 2270,3930 2430,3930 R45.2
NetC13_2: C13.2 R44.2 U6.9 | length 1098.5
  Top Layer w20: R44.2 2702,3902 2702,4066 2800,4164 U6.9
  Bottom Layer w20: C13.2 R44.2
NetC14_1: C14.1 R41.2 U6.14 W2.1 | length 1343.8
  Bottom Layer w20: R41.2 2700,3900 3000,3900 3030,3870 ; W2.1 C14.1 3030,3870 ; U6.14 3300,4202 3279,4202 3163,4086 3066,4086 3030,4050 3030,3870
NetC14_2: C14.2 R46.2 U6.13 | length 432.8
  Top Layer w20: U6.13 3200,4200 R46.2
  Bottom Layer w20: C14.2 3200,4000 R46.2
NetC15_1: C15.1 R49.2 U6.5 | length 735.8
  Top Layer w20: R49.2 2570,4630 2875,4630 2900,4605 U6.5
  Bottom Layer w20: C15.1 2400,4800 R49.2
NetC16_1: C16.1 W2.2 | length 1472.7
  Top Layer w20: v1(2298,3455) 2298,3182 2350,3130 2470,3130 2713,3373 2713,3513 v1(2900,3700)
  Bottom Layer w20: C16.1 2245,3455 v1(2298,3455) ; v1(2900,3700) W2.2
NetC16_2: C16.2 R42.1 R47.2 R50.2 | length 1490.5
  Top Layer w20: R50.2 R47.2
  Bottom Layer w20: C16.2 2300,3300 R50.2 ; R47.2 2700,3500 2770,3570 2870,3570 2950,3490 3190,3490 R42.1
NetC17_1: C17.1 R40.1 R43.1 R44.1 | length 541.4
  Top Layer w20: R44.1 R40.1
  Bottom Layer w20: C17.1 2300,4200 R40.1 R43.1
NetC18_1: C18.1 R41.1 R45.1 R46.1 | length 1147.1
  Bottom Layer w20: R45.1 R41.1 C18.1 2800,3700 2970,3530 3170,3530 3300,3660 R46.1
NetC27_1: C27.1 R51.1 R52.1 | length 1663.8
  Top Layer w20: R51.1 3577,3123 4823,3123 R52.1
  Bottom Layer w20: R51.1 C27.1
NetD1_1: D1.1 R27.1 | length 100
  Top Layer w20: R27.1 D1.1
NetD2_1: D2.1 R26.1 | length 501.1
  Top Layer w20: D2.1 5572,3628 5627,3628 5699,3700 R26.1
NetD3_1: D3.1 R25.1 | length 200
  Bottom Layer w20: D3.1 R25.1
NetD4_1: D4.1 D5.2 R47.1 R48.2 | length 1548.5
  Bottom Layer w20: D5.2 2530,3330 2830,3330 R48.2 ; R47.1 R48.2 ; D4.1 3501,3700 3201,3400 R48.2
NetD6_1: D6.1 D7.2 R53.1 R54.2 | length 641.4
  Top Layer w20: R53.1 D7.2
  Bottom Layer w20: R53.1 5600,3200 D6.1 R54.2
NetDS1_1: DS1.1 R14.2 | length 200
  Bottom Layer w20: R14.2 DS1.1
NetDS1_2: DS1.2 R13.2 | length 200
  Bottom Layer w20: R13.2 DS1.2
NetDS1_4: DS1.4 R12.2 | length 200
  Bottom Layer w20: R12.2 DS1.4
NetDS1_6: DS1.6 R11.2 | length 200
  Bottom Layer w20: DS1.6 R11.2
NetDS1_7: DS1.7 R10.2 | length 200
  Bottom Layer w20: DS1.7 R10.2
NetDS1_9: DS1.9 R15.2 | length 200
  Bottom Layer w20: DS1.9 R15.2
NetDS1_10: DS1.10 R16.2 | length 200
  Bottom Layer w20: DS1.10 R16.2
NetDS2_1: DS2.1 R22.2 | length 200
  Bottom Layer w20: R22.2 DS2.1
NetDS2_2: DS2.2 R21.2 | length 200
  Bottom Layer w20: R21.2 DS2.2
NetDS2_4: DS2.4 R20.2 | length 200
  Bottom Layer w20: R20.2 DS2.4
NetDS2_6: DS2.6 R19.2 | length 200
  Bottom Layer w20: DS2.6 R19.2
NetDS2_7: DS2.7 R18.2 | length 200
  Bottom Layer w20: DS2.7 R18.2
NetDS2_9: DS2.9 R23.2 | length 200
  Bottom Layer w20: DS2.9 R23.2
NetDS2_10: DS2.10 R24.2 | length 200
  Bottom Layer w20: DS2.10 R24.2
NetDS3_1: DS3.1 R32.2 | length 200
  Bottom Layer w20: R32.2 DS3.1
NetDS3_2: DS3.2 R31.2 | length 200
  Bottom Layer w20: R31.2 DS3.2
NetDS3_4: DS3.4 R30.2 | length 200
  Bottom Layer w20: R30.2 DS3.4
NetDS3_6: DS3.6 R29.2 | length 200
  Bottom Layer w20: DS3.6 R29.2
NetDS3_7: DS3.7 R28.2 | length 200
  Bottom Layer w20: DS3.7 R28.2
NetDS3_9: DS3.9 R33.2 | length 200
  Bottom Layer w20: DS3.9 R33.2
NetDS3_10: DS3.10 R34.2 | length 200
  Bottom Layer w20: DS3.10 R34.2
NetJ2_2: J2.2 Q1.1 | length 1343.5
  Bottom Layer w20: J2.2 2845,5000 2820,4975 2820,4830 2832.76,4817.24 3100.8,4817.24 3172.08,4745.96 3250,4745.96 3510.96,4485 3665,4485 Q1.1
NetJMP1_2: JMP1.2 U7.2 | length 323.6
  Bottom Layer w20: JMP1.2 3500,5250 3520,5230 3675,5230 3700,5205 U7.2
NetJMP1_3: JMP1.3 RV1.3 | length 541.4
  Bottom Layer w20: RV1.3 3100,5400 3200,5300 JMP1.3
NetP1_1: P1.1 R4.1 U5.62 | length 3651
  Top Layer w20: R4.1 8220,5500 8270,5550 v1(8270,6099)
  Bottom Layer w20: U5.62 6011,6111 6833,6111 6892,6170 8199,6170 v1(8270,6099) ; R4.1 8400,5500 P1.1
NetP1_3: P1.3 U5.64 | length 3622.7
  Top Layer w20: U5.64 5956.4,6156.4 6671.78,6156.4 6717.18,6111 6792,6111 6891,6210 8379,6210 v1(8428,6161)
  Bottom Layer w20: v1(8428,6161) 8659,6161 8770,6050 8770,5970 P1.3
NetP1_5: P1.5 R2.2 U5.63 | length 3373.4
  Top Layer w20: R2.2 8200,6145 8225,6170 8300,6170 8388,6082 8515,6082 8611,5986 v1(8611,5911)
  Bottom Layer w20: U5.63 5970,5830 6469,5830 6710,6071 6863.71,6071 6913.71,6021 7203,6021 7252,6070 8130,6070 R2.2 ; P1.5 v1(8611,5911)
NetP1_9: P1.9 R3.2 U5.67 | length 4587.1
  Top Layer w20: v1(6755,6181) 6824,6250 8450,6250 R3.2
  Bottom Layer w20: U5.67 5630,5830 5230,5830 5230,6070 5719,6070 5830,6181 v1(6755,6181) ; P1.9 R3.2
NetQ1_2: Q1.2 U7.1 | length 729.7
  Top Layer w20: Q1.2 3900,4670 3910,4680 3910,4917 3800,5027 U7.1
NetQ1_3: Q1.3 R39.1 U7.3 | length 1255.7
  Top Layer w20: U7.3 3600,5050 3650,5000 3770,5000 3870,4900 3870,4800 3825,4755 3685,4755 3630,4700 3630,4590 Q1.3
  Bottom Layer w20: R39.1 3520,4700 Q1.3
NetR1_2: R1.2 U4.1 | length 170.7
  Bottom Layer w20: U4.1 7950,5350 R1.2
NetR5_2: R5.2 U5.8 | length 341.4
  Top Layer w20: U5.8 5700,4000 R5.2
NetR6_2: R6.2 U5.60 | length 1338.7
  Top Layer w20: U5.60 6116,6116 6565,6116 6610,6071 6831,6071 6952,5950 6952,5748 R6.2
NetR7_2: R7.2 U5.61 | length 1282.8
  Top Layer w20: R7.2 4930,5830 5930,5830 U5.61
NetR35_1: R35.1 U5.100 | length 665.7
  Bottom Layer w20: R35.1 4700,4100 U5.100
NetR37_2: R37.2 RV1.1 | length 524.3
  Bottom Layer w20: R37.2 3000,5800 RV1.1
NetR38_1: R38.1 U5.87 | length 682.8
  Bottom Layer w20: R38.1 4527,5173 4927,5173 U5.87
NetR43_2: R43.2 U6.6 U6.7 | length 320.7
  Bottom Layer w20: R43.2 2550,4550 U6.7 U6.6
NetR52_2: R52.2 R53.2 R55.1 | length 758
  Top Layer w20: R55.1 R53.2
  Bottom Layer w20: R52.2 4570,3130 5030,3130 R55.1
NetU1_1: U1.1 U5.6 | length 1357.1
  Bottom Layer w20: U5.6 5730,4070 6250,4070 6314,4006 6314,3600 6364,3550 U1.1
NetU1_2: U1.2 U5.7 | length 2347.4
  Bottom Layer w20: U5.7 5522,4378 5335.33,4378 5230,4272.67 5230,4130 5507,4113 5600,4020 6204,4020 6274,3950 6274,3500 6324,3450 U1.2
NetU1_5: U1.5 U5.17 | length 2346.7
  Top Layer w20: U5.17 6100,4340 6262.39,4502.39 6501.61,4502.39 6610.24,4393.76 6610.24,4050.24 6530,3970 6530,3830 6713,3830 6980,3563 v1(6980,3278)
  Bottom Layer w20: U1.5 6952,3250 v1(6980,3278)
NetU1_6: U1.6 U5.16 | length 1912.5
  Top Layer w20: U5.16 6030,4130 6030,3290 6200,3120 6590,3120 6620,3150 6620,3300 6670,3350 U1.6
NetU4_5: U4.5 U5.10 | length 3417.6
  Top Layer w20: v1(7550,4750) 7630,4830 7630,5625 7605,5650 U4.5
  Bottom Layer w20: U5.10 5890,4110 6270,4110 6300,4080 7008.41,4080 7030,4101.59 7030,4657 7143,4770 7530,4770 v1(7550,4750)
NetU5_79: U5.79 U8.16 | length 2706.8
  Top Layer w20: v1(3886,3826) 3886,4599 4014,4727 4250,4727 4291,4768 4291,5000 4440,5149 4649,5149 U5.79
  Bottom Layer w20: v1(3886,3826) 4000,3826 4050,3776 U8.16
NetU5_84: U5.84 U8.14 | length 2386.1
  Top Layer w20: U8.14 4250,3753 4300,3803 4800,3803 4937.54,3940.54 4937.54,4129.55 5210,4402.01 5210,5190 U5.84
NetU5_85: U5.85 U8.12 | length 2891.4
  Top Layer w20: U8.12 4450,3595 4425,3570 4010,3570 3980,3600 3980,3730 4179,3929 4654,3929 4784,4059 4784,5057.2 4926.8,5200 U5.85
NetU5_88: U5.88 U8.15 | length 2171.5
  Top Layer w20: U8.15 4150,3793 4200,3843 4661,3843 4895.47,4077.47 4895.47,4175.47 5170,4450 5170,5030 U5.88
NetU7_6: U7.6 U7.7 | length 100
  Bottom Layer w20: U7.7 U7.6
NetU7_8: U7.8 U7.9 | length 100
  Bottom Layer w20: U7.8 U7.9
NetU7_13: U7.13 U7.14 | length 100
  Bottom Layer w20: U7.13 U7.14
SW0: R9.1 S1.1 U5.98 | length 1746.3
  Top Layer w20: R9.1 4275,4425 4275,4300 4350,4225 S1.1
  Bottom Layer w20: S1.1 4350,4095 4375,4070 4483,4070 4598,3955 4704.3,3955 5170,4420.7 5170,4530 U5.98
SW1: R8.1 S1.2 U5.97 | length 985
  Top Layer w20: R8.1 4450,4050 S1.2
  Bottom Layer w20: S1.2 4450,4283 4500,4333 4733,4333 U5.97
VSC: C15.2 R51.2 W1.2 | length 3873.3
  Bottom Layer w20: W1.2 2300,5000 C15.2 2130,4830 2130,3199 2200,3129 2542,3129 2689,3276 3360,3276 3500,3416 R51.2
pads on no net: DS1.5 DS2.5 DS3.5 P1.6 P1.7 P1.8 S2.3 S2.4 U4.2 U4.3 U4.6 U4.7 U5.1 U5.2 U5.12 U5.37 U5.49 U5.50 U5.51 U5.52 U5.53 U5.54 U5.55 U5.56 U5.57 U5.65 U5.68 U5.69 U5.70 U5.71 U5.72 U5.73 U5.74 U5.75 U5.76 U5.77 U5.78 U5.86 U5.91 U5.92 U5.99 U8.13

## Keep-outs
Keep-Out Layer:
  lines w10: 2050,3050 8840,3050 8840,6296 2050,6296 2050,3050

## Silkscreen, mask and mechanical layers (free items; w line width, h text height)
Drill Drawing:
  text ".LEGEND" at 9090,3200 h60
  text "Drill Drawing." at 9090,3100 h60

## Dimensions
2050,3050 to 8840,3050 on Mechanical 1
2050,3050 to 2050,6296 on Mechanical 1

## Text inside footprints (layer, text, board x,y; h text height)
P1: Top Overlay "1" at 8527.56,5493.7 h50 r90; Top Overlay "2" at 8425.2,5485.83 h50 r90
Q1: Top Overlay "S" at 3525,4540 h59.05; Top Overlay "G" at 3680,4735 h59.05; Top Overlay "D" at 3835,4535 h59.05
U2: Top Overlay "1" at 3590.16,5935.63 h59.06; Top Overlay "2" at 3680.32,5935.63 h59.06; Top Overlay "3" at 3780.32,5935.63 h59.06
U3: Top Overlay "3" at 4570.39,5920.59 h59.06; Top Overlay "1" at 4400,5920.59 h59.06
U5: Top Overlay "1" at 5300,4000 h80